# Altium PCB Pillpal_PCB01.PcbDoc
Units mm, origin at the board's own origin, x right, y up, seen from the top; angles counter-clockwise.
Board outline 46 x 59.6 mm, 2 copper layers (Top Layer, Bottom Layer); 30 components, 29 nets, 132 pads, 32 vias.
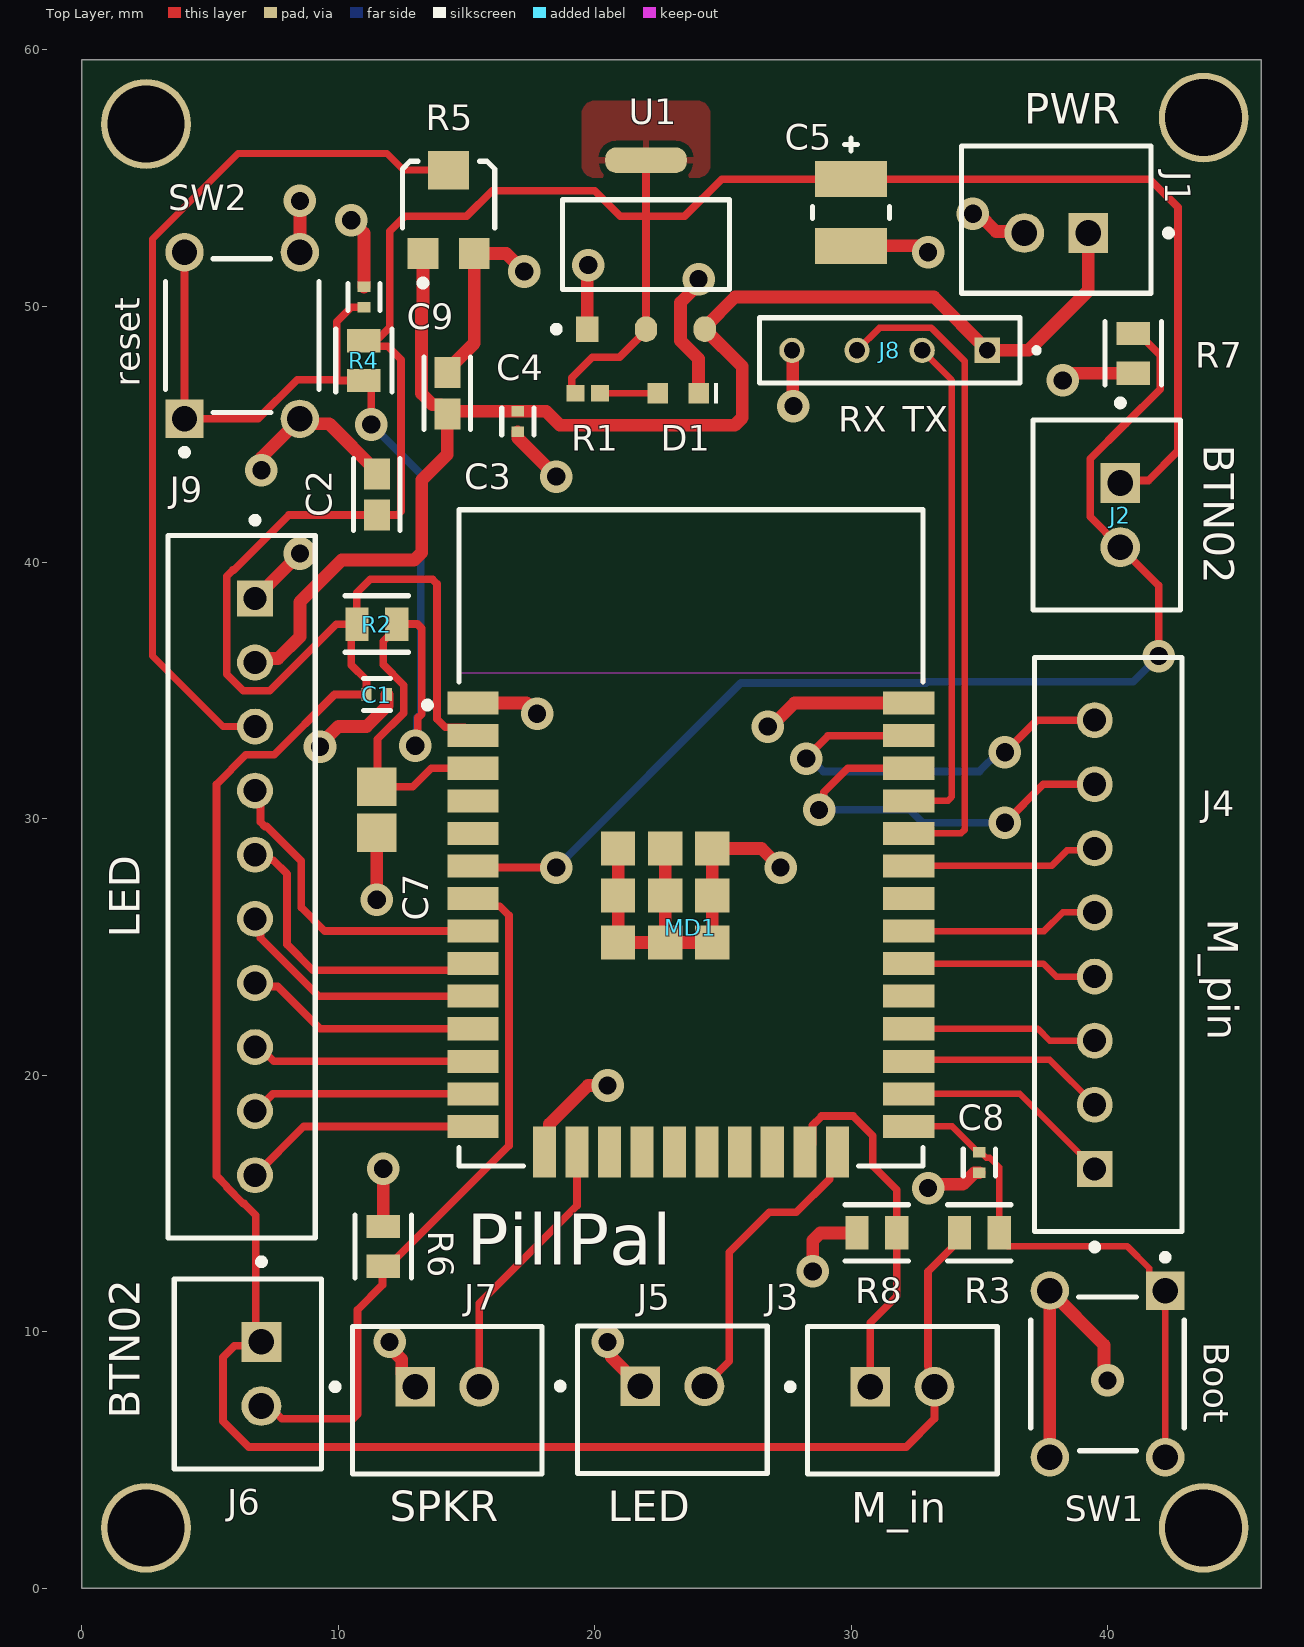
[diagram p0: Top Layer view]
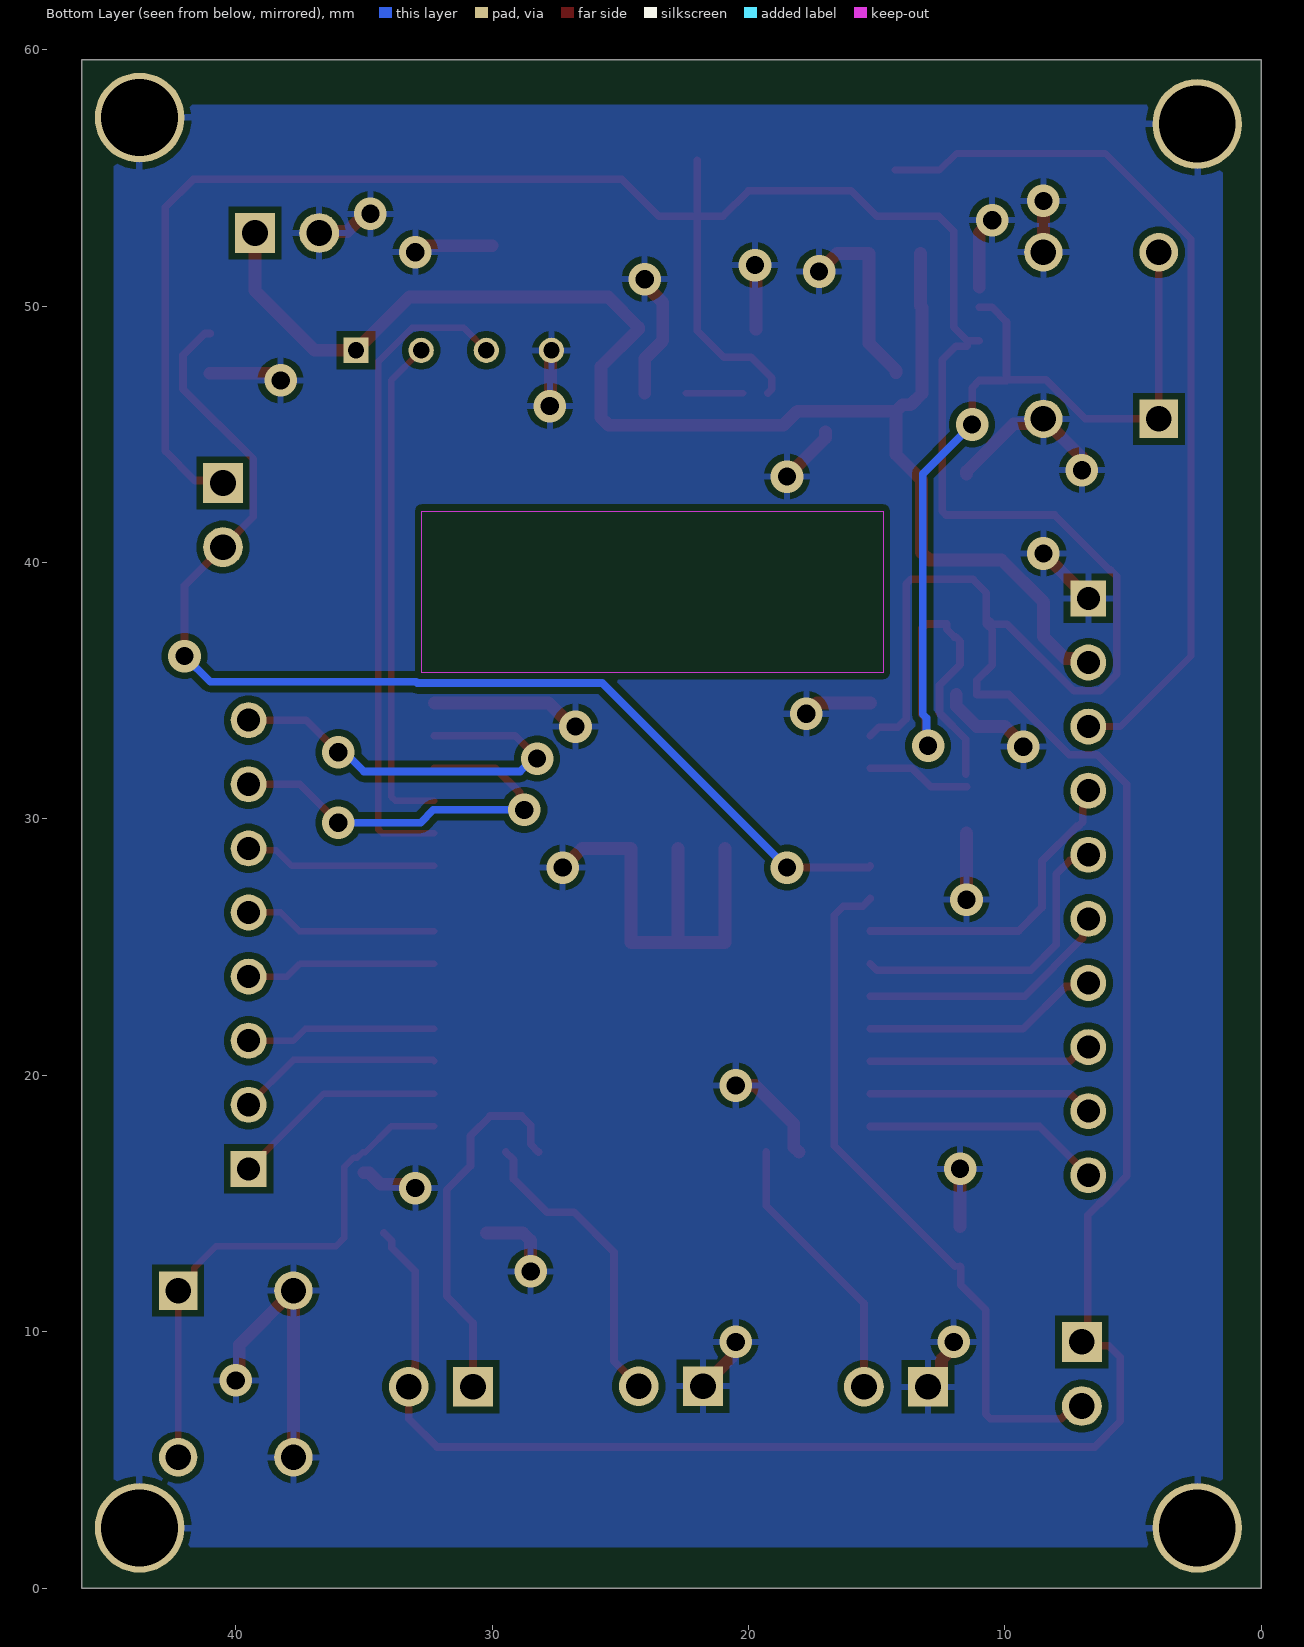
[diagram p1: Bottom Layer view, seen from below]
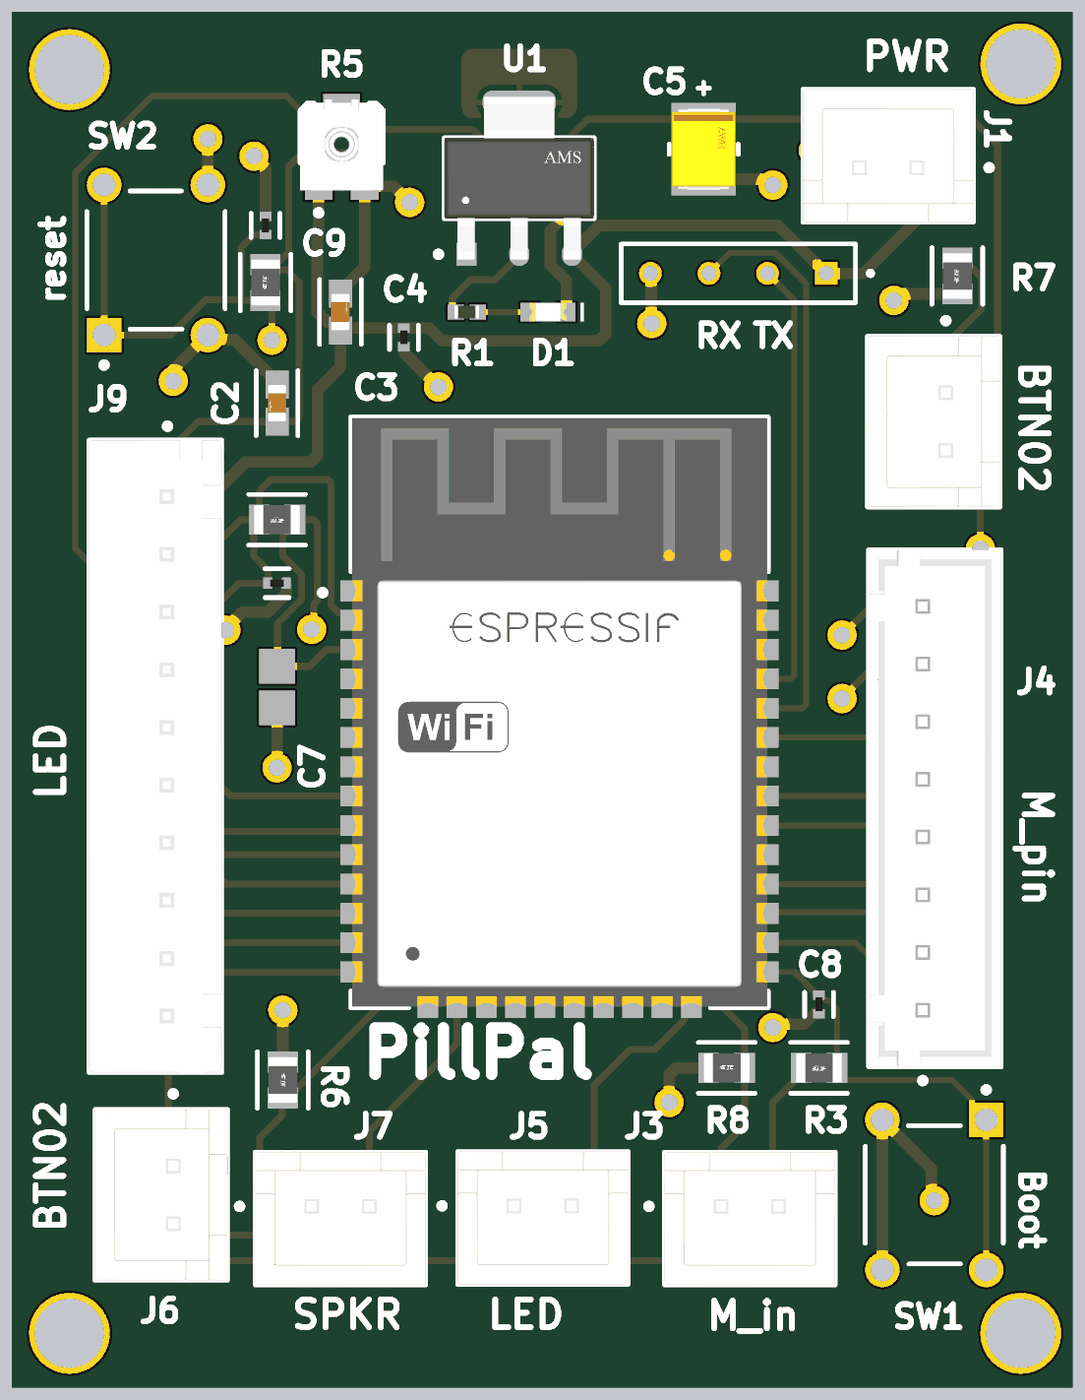
[diagram p2: 3D render of the assembled board from above, using the file's embedded part models]

## Layer stack, top to bottom
Top Solder: solder mask 0.0102, Solder Resist, Dk 3.5
Top Layer: signal copper 0.0356
Dielectric 1: dielectric 0.32, FR-4, Dk 4.8
Bottom Layer: signal copper 0.0356
Bottom Solder: solder mask 0.0102, Solder Resist, Dk 3.5

## Board outline
0,0 46,0 46,59.6 0,59.6

## Design rules (kind name [scope] priority, off if disabled: settings)
Clearance Clearance_1 [OnMid vs OnMid] p1: gap=0.254 ignorepadtopadclearanceinfootprint=FALSE except(0: Arc-Hole Track-Hole SMDPad-Hole THPad-Hole Via-Hole Fill-Hole Poly-Hole Region-Hole Text-Hole Hole-Hole) sourcerule=38 cellrowname=All cellrowtype=0 cellcolname=All cellcoltype=0 innerlayers=TRUE
Clearance Clearance_2 [(ExistsOnLayer('Top Layer') Or ExistsOnLayer('Bottom Layer')) vs (ExistsOnLayer('Top Layer') Or ExistsOnLayer('Bottom Layer'))] p2: gap=0.254 ignorepadtopadclearanceinfootprint=FALSE except(0: Arc-Hole Track-Hole SMDPad-Hole THPad-Hole Via-Hole Fill-Hole Poly-Hole Region-Hole Text-Hole Hole-Hole) sourcerule=38 cellrowname=All cellrowtype=0 cellcolname=All cellcoltype=0 outerlayers=TRUE
Clearance [All] p3: gap=0.254 ignorepadtopadclearanceinfootprint=FALSE ismatrix=TRUE
HoleSize [All] p1: absolutevalues=TRUE maxlimit=3 minlimit=0.025 maxpercent=80.000 minpercent=20.000
MinimumSolderMaskSliver [All] p1: minsoldermaskwidth=0.09
PolygonConnect [All] p1: connectstyle=Relief reliefconductorwidth=0.254 reliefentries=4 polygonreliefangle="90 Angle" airgapwidth=0.254
RoutingTopology RoutingTopology_1 [All] p1: topology=Vertical
RoutingTopology [All] p2: topology=Shortest
RoutingVias [All] p1: holewidth=0.711 width=1.27 viastyle="Through Hole" minholewidth=0.711 minwidth=1.27 maxholewidth=0.711 maxwidth=1.27
SolderMaskExpansion [All] p1: expansion=0.102 istentingtop=FALSE
UnRoutedNet [All] p1: checkbadconnections=TRUE
Width MaxMinWidth_1 [All] p1: maxlimit=0.5 minlimit=0.254 preferedwidth=0.3 minimp=50.000000 maximp=50.000000 favimp=50.000000
Width [All] p2: maxlimit=0.254 minlimit=0.254 preferedwidth=0.254
26 further rules are at their usual default settings.

## Components (designator, comment, footprint, x,y, rotation, side; value= is the part's Value field where it differs from the comment)
C1 "0.1uF" FP-GRM15-MFG 11.5,34.85 r0 top value=0.10μF
C2 "10uF" FP-GRM188-0_1-e0_2_0_55-IPC_A 11.5,42.652 r270 top
C3 "0.1uF" FP-GRM15-MFG 17,45.5 r90 top value=0.10μF
C4 "10uF" FP-GRM188-0_1-e0_2_0_55-IPC_A 14.25,46.6 r90 top
C5 "TAJB226K016RNJ" FP-TAJB-MFG 30,53.65 r90 top
C7 "1uF" CAPC2013X145X50ML20T25 11.5,30.35 r90 top
C8 "0.1uF" FP-GRM15-MFG 35,16.6 r90 top value=0.10μF
C9 "0.1uF" FP-GRM15-MFG 11,50.35 r270 top value=0.10μF
D1 "150060RS75000" WL-SMCW_0603_150060xx75000 23.25,46.6 r180 top
J1 "B2B-XH-A(LF)(SN)" FP-B2B-XH-A_LF_SN-MFG 38,53.375 r180 top
J2 "B2B-XH-A(LF)(SN)" FP-B2B-XH-A_LF_SN-MFG 39.975,41.85 r270 top
J3 "B2B-XH-A(LF)(SN)" FP-B2B-XH-A_LF_SN-MFG 32,7.325 r0 top
J4 "B8B-XH-A(LF)(SN)" FP-B8B-XH-A_LF_SN-MFG 40.025,25.1 r270 top
J5 "B2B-XH-A(LF)(SN)" FP-B2B-XH-A_LF_SN-MFG 23.029,7.35 r0 top
J6 "B2B-XH-A(LF)(SN)" FP-B2B-XH-A_LF_SN-MFG 6.475,8.35 r270 top
J7 "B2B-XH-A(LF)(SN)" FP-B2B-XH-A_LF_SN-MFG 14.25,7.325 r0 top
J8 "TS-104-T-A" SAMTEC_TS-104-T-A 31.5,48.274 r180 top
J9 "B10B-XH-A(LF)(SN)" FP-B10B-XH-A_LF_SN-MFG 6.225,27.35 r90 top
MD1 "ESP32-WROOM-32D" FP-ESP32-WROOM-32D-MFG 23.75,29.255 r0 top
R1 "RC0402JR-0775RL" RESC1005X40X25ML5T10 19.725,46.6 r0 top
R2 "10k" FP-CRG0805-IPC_C 11.5,37.6 r180 top
R3 "10k" FP-CRG0805-IPC_C 35,13.85 r180 top
R4 "10k" FP-CRG0805-IPC_C 11,47.876 r90 top
R5 "TC33X-2-103E" BOUR-TC33X-2_V 14.3,53.85 r90 top
R6 "10k" FP-CRG0805-IPC_C 11.75,13.324 r270 top
R7 "10k" FP-CRG0805-IPC_C 41,48.158 r90 top
R8 "10k" FP-CRG0805-IPC_C 31,13.85 r0 top
SW1 "1825910-6" TECO-1825910-6_V 40,8.35 r270 top
SW2 "1825910-6" TECO-1825910-6_V 6.25,48.85 r90 top
U1 "AMS1117-3.3" FP-AMS1117-IPC_C 22,52.395 r90 top

## Footprints (in the part's own frame and the unit in brackets; to place one, negate y for a bottom-side part, rotate by r counter-clockwise, add the part's x,y. Pads: shape width x height; smd on the part's side, far side on the other; paste and mask are expansions set on the pad)
BOUR-TC33X-2_V [mm] "SMD, 3-Leads, Body 3.8x3.6mm"
  rect 1.2x1.2 smd: 1(-1.8,1) 3(-1.8,-1)
  rect 1.5x1.6 smd: 2(1.45,0)
  silkscreen extent -3.07,-1.8 1.8,1.8, body extent -2,-1.8 1.96,1.8, height 1.15
CAPC2013X145X50ML20T25 [mm] "Chip Capacitor, 2-Leads, Body 2.00x1.25mm, IPC Low Density"
  rect 1.5x1.55 smd: 1(-0.9,0) 2(0.9,0)
  body extent -1.1,-0.72 1.1,0.72, height 1.45
FP-AMS1117-IPC_C [mm]
  rect 1.004x0.872 smd paste+0 mask+0: 1(-3.295,2.29)
  rrect100% 1.004x0.872 smd paste+0 mask+0: 2(-3.295,0) 3(-3.295,-2.29)
  rrect87% 1.004x3.182 smd paste+0 mask+0: 4(3.295,0)
  silkscreen extent -3.42,-3.25 1.75,3.62, body extent -3.9,-3.35 3.9,3.35, height 0.25
FP-B2B-XH-A_LF_SN-MFG [mm]
  rect 1.55x1.55 hole 1 paste-2539.97 mask+0: 1(-1.25,0.525)
  round 1.55 hole 1 paste-2539.97 mask+0: 2(1.25,0.525)
  silkscreen extent -4.5,-2.88 3.7,2.88, body extent -3.8,-2.98 3.8,2.98, height 0.25
FP-B8B-XH-A_LF_SN-MFG [mm]
  rect 1.4x1.4 hole 0.9 paste-2539.97 mask+0: 1(8.75,-0.525)
  round 1.4 hole 0.9 paste-2539.97 mask+0: 2(6.25,-0.525) 3(3.75,-0.525) 4(1.25,-0.525) 5(-1.25,-0.525) 6(-3.75,-0.525) 7(-6.25,-0.525) 8(-8.75,-0.525)
  silkscreen extent -11.2,-2.88 11.92,2.88, body extent -11.3,-2.98 11.3,2.98, height 0.25
FP-B10B-XH-A_LF_SN-MFG [mm]
  rect 1.4x1.4 hole 0.9 paste-2539.97 mask+0: 1(11.25,-0.525)
  round 1.4 hole 0.9 paste-2539.97 mask+0: 2(8.75,-0.525) 3(6.25,-0.525) 4(3.75,-0.525) 5(1.25,-0.525) 6(-1.25,-0.525) 7(-3.75,-0.525) 8(-6.25,-0.525) 9(-8.75,-0.525) 10(-11.25,-0.525)
  silkscreen extent -13.7,-2.88 14.42,2.88, body extent -13.8,-2.98 13.8,2.98, height 0.25
FP-CRG0805-IPC_C [mm]
  rect 0.906x1.307 smd paste+0 mask+0: 1(-0.776,0) 2(0.776,0)
  silkscreen extent -1.23,-1.1 1.23,1.1, body extent -1.33,-0.8 1.33,0.8, height 0.25
FP-ESP32-WROOM-32D-MFG [mm]
  rect 2x0.9 smd paste+0 mask+0: 1(-8.5,5.26) 2(-8.5,3.99) 3(-8.5,2.72) 4(-8.5,1.45) 5(-8.5,0.18) 6(-8.5,-1.09) 7(-8.5,-2.36) 8(-8.5,-3.63) 9(-8.5,-4.9) 10(-8.5,-6.17) 11(-8.5,-7.44) 12(-8.5,-8.71) 13(-8.5,-9.98) 14(-8.5,-11.25) 25(8.5,-11.25) 26(8.5,-9.98) 27(8.5,-8.71) 28(8.5,-7.44) 29(8.5,-6.17) 30(8.5,-4.9) 31(8.5,-3.63) 32(8.5,-2.36) 33(8.5,-1.09) 34(8.5,0.18) 35(8.5,1.45) 36(8.5,2.72) 37(8.5,3.99) 38(8.5,5.26)
  rect 0.9x2 smd paste+0 mask+0: 15(-5.715,-12.25) 16(-4.445,-12.25) 17(-3.175,-12.25) 18(-1.905,-12.25) 19(-0.635,-12.25) 20(0.635,-12.25) 21(1.905,-12.25) 22(3.175,-12.25) 23(4.445,-12.25) 24(5.715,-12.25)
  rect 1.33x1.33 smd paste+0 mask+0: 39(-2.835,-4.075) 39(-2.835,-2.24) 39(-2.835,-0.405) 39(-1,-4.075) 39(-1,-2.24) 39(-1,-0.405) 39(0.835,-4.075) 39(0.835,-2.24) 39(0.835,-0.405)
  Keep-Out Layer region: -9,6.45 9,6.45 9,12.75 -9,12.75
  Keep-Out Layer region: -9,6.45 9,6.45 9,12.75 -9,12.75
  silkscreen extent -10.4,-12.8 9.05,12.8, body extent -9.6,-13.35 9.6,12.9, height 0.25
FP-GRM15-MFG [mm]
  rect 0.4x0.5 smd paste+0 mask+0: 1(-0.4,0) 2(0.4,0)
  silkscreen extent -0.53,-0.63 0.53,0.63, body extent -0.7,-0.38 0.7,0.38, height 0.25
FP-GRM188-0_1-e0_2_0_55-IPC_A [mm]
  rect 1.208x1.012 smd paste+0 mask+0: 1(-0.802,0) 2(0.802,0)
  silkscreen extent -1.41,-0.91 1.41,0.91, body extent -1.91,-1.01 1.91,1.01, height 0.25
FP-TAJB-MFG [mm]
  rect 1.4x2.8 smd paste+0 mask+0: 1(-1.3,0) 2(1.3,0)
  silkscreen extent -0.23,-1.5 2.9,1.5, body extent -2.1,-1.6 2.1,1.6, height 0.25
RESC1005X40X25ML5T10 [mm] "Chip Resistor, 2-Leads, Body 1.05x0.55mm, IPC Low Density"
  rect 0.7x0.65 smd: 1(-0.475,0) 2(0.475,0)
  body extent -0.53,-0.28 0.53,0.28, height 0.4
SAMTEC_TS-104-T-A [mm]
  rect 0.985x0.985 hole 0.635: 01(-3.81,0)
  round 0.985 hole 0.635: 02(-1.27,0) 03(1.27,0) 04(3.81,0)
  silkscreen extent -5.83,-1.27 5.08,1.27
TECO-1825910-6_V [mm] "Switch, 4-Leads, Body 5.99x5.99mm"
  rect 1.5x1.5 hole 0.99: 1(-3.25,2.25)
  round 1.5 hole 0.99: 2(3.25,2.25) 3(-3.25,-2.25) 4(3.25,-2.25)
  silkscreen extent -4.67,-2.99 2.99,3, body extent -3,-2.99 2.99,3, height 5
WL-SMCW_0603_150060xx75000 [mm] "SMD Mono-color Chip LED, body 1.6x0.8mm"
  rect 0.8x0.8 smd: 1(-0.8,0) 2(0.8,0)
  silkscreen extent -1.55,-0.4 -1.4,0.4, body extent -0.8,-0.4 0.8,0.4, height 0.7

## Part data
C1 C3 C8 C9: library part CMP-2100-03641-2, "CAP CER 0.1UF 16V X7R 0402", Capacitance=0.10μF, Manufacturer=Murata, Manufacturer Part Number=GRM155R71C104KA88D, Package=GRM15, Temperature="-55°C to +125°C", Temperature Characteristic=X7R, Temperature Range High=+125°C, Temperature Range Low=-55°C, Tolerance=10%, Voltage Rating=16Vdc, Category=Cap, ComponentLink2Description=Datasheet, ComponentLink2URL=https://search.murata.co.jp/Ceramy/image/img/A01X/G101/ENG/GRM155R71H471KA01-01A.pdf, Device Class L1="Passive Components", Device Class L2=Capacitors, Device Class L3="Ceramic Capacitors", Digikey Description="CAP CER 0.1UF 16V X7R 0402", Height=0.55mm, Ipc Land Pattern Name=CAPC10050X219, Lead Free=yes, Material=Ceramic, Mouser Description="0402 0.1 uF 16V ±10 % Tolerance X7R SMT Multilayer Ceramic Capacitor", Octopart=https://octopart.com/grm155r71c104ka88d-murata-196880, RoHS=TRUE, Standoff Height=0mm
C2 C4: library part CMP-2006-02792-2, "Chip Multilayer Ceramic Capacitors for General Purpose, 0603, 10uF, X5R, 15%, 20%, 6.3V", Case Code (Imperial)=0603, Case Code (Metric)=1608, Dielectric=X5R, Max Operating Temperature=85°C, Min Operating Temperature=-55°C, Package Quantity=4000, Tolerance=20%, Voltage=6.3V, Capacitance=10uF, Case/Package=0603, Depth=0.8mm, Height=0.8mm, Lead Free="Lead Free", Length=1.6mm, Material=Ceramic, Mount="Surface Mount", Packaging="Tape and Reel", Radiation Hardening=No, REACH SVHC="No SVHC", Termination=SMD/SMT, Thickness=0.035inch, Voltage Rating=6.3V, Voltage Rating (DC)=6.3V, Width=0.031inch
C5: library part CMP-2100-03689-2, "22uF 16V  ±10% 2.3Ω 1210  SMD Tantalum Capacitor", Capacitance=22uF, Case Code (Imperial)=1210, Case Code (Metric)=3528, Dielectric Material=Tantalum, ESR (Equivalent Series Resistance)=2.3R, Leakage Current=3.5uA, Max Operating Temperature=125°C, Min Operating Temperature=-55°C, Package Quantity=1, Tolerance=10%, Voltage=16V, Case/Package=1210, Construction=Flat, Depth=2.8mm, Dissipation Factor=6%, Features="General Purpose", Height=1.9mm, Height - Seated (Max)=0.083inch, Lead Free="Lead Free", Length=3.5mm, Mount="Surface Mount", Number of Pins=2, Packaging="Tape and Reel", Polarity=Polar, Radiation Hardening=No, REACH SVHC="No SVHC", RoHS Compliant=Yes, Series=TAJ, Termination=SMD/SMT, Voltage Rating=16V, Voltage Rating (DC)=16V, Width=2.8mm
C7: library part CMP-1036-04731-2, Manufacturer=Kemet, Part Number=C0805C105K9PACTU
D1: library part CMP-1426-00001-3, Case Code (Imperial)=0603, Case Code (Metric)=1608, Color=Red, Forward Current=100mA, Forward Voltage=2V, Max Junction Temperature (Tj)=95°C, Max Operating Temperature=85°C, Max Reverse Voltage (DC)=5V, Min Operating Temperature=-40°C, Power Dissipation=72mW, Test Current=20mA, Case/Package=0603, Dominant Wavelength=625nm, Height=700µm, Length=1.6mm, Lens Style="Clear, Rectangular", Luminous Intensity=250mcd, Mount="Surface Mount", NexarPartId=29717776, Packaging="Tape and Reel", Peak Wavelength=630nm, REACH SVHC=Unknown, Reverse Voltage=5V, RoHS=Compliant, Viewing Angle=140°, Wavelength=625nm, Width=800µm
J1 J2 J3 J5 J6 J7: library part CMP-2000-05888-3, "CONN HEADER VERT 2POS 2.5MM", Color=Natural, Contact Resistance=20mR, Current Rating=3A, Housing Color=White, Insulation Resistance=1GR, Max Operating Temperature=85°C, Max Voltage Rating (AC)=250V, Min Operating Temperature=-25°C, Connector Type="Male Pin", Contact Material=Brass, Contact Plating=Tin, Contact Type="Male Pin", Depth=5.75mm, Fastening Type=Detent, Housing Material=Polyamide, Lead Free="Lead Free", Lead Pitch=2.5mm, Length=7.4mm, Max Current Rating=3A, Max Voltage Rating (DC)=250V, Mount="Through Hole", Number of Contacts=2, Number of Positions=2, Number of Rows=1, Orientation=Straight, Packaging=Bulk, Pitch=2.5mm, REACH SVHC="No SVHC", Series=XH, Termination=Solder, Voltage Rating=250V, Voltage Rating (AC)=250V, Wire/Cable Gauge=22AWG
J4: library part CMP-17438-000015-1, "CONN HEADER VERT 8POS 2.5MM", Color=Natural, Contact Resistance=20mR, Current Rating=3A, Housing Color=White, Insulation Resistance=1GR, Max Operating Temperature=85°C, Max Voltage Rating (AC)=250V, Min Operating Temperature=-25°C, Connector Type="Male Pin", Contact Material=Brass, Contact Plating=Tin, Contact Type="Male Pin", Depth=5.75mm, Fastening Type=Detent, Housing Material=Polyamide, Lead Free="Lead Free", Lead Pitch=2.5mm, Length=22.4mm, Max Current Rating=3A, Mount="Through Hole", Number of Contacts=8, Number of Positions=8, Number of Rows=1, Orientation=Straight, Packaging=Bulk, Pitch=2.5mm, REACH SVHC="No SVHC", Series=XH, Termination=Press-Fit, Voltage Rating=250V, Voltage Rating (AC)=250V, Wire/Cable Gauge=22AWG
J8: "TS - Samtec 2.54mm Single Row Machined Terminal Strip - Fast Stock", Package=None, Supplier Part Number 1=SAM1112-04-ND, Availability="In Stock", Check_prices=https://www.snapeda.com/parts/TS-104-T-A/Samtec+Inc./view-part/?ref=eda, MF="Samtec Inc.", MP=TS-104-T-A, Price=None, Purchase-URL=https://pricing.snapeda.com/search/part/TS-104-T-A/?ref=eda, SnapEDA_Link=https://www.snapeda.com/parts/TS-104-T-A/Samtec+Inc./view-part/?ref=snap, Supplier 1=Digikey
J9: library part CMP-17439-000145-1, "CONN HEADER VERT 10POS 2.5MM", Color=Natural, Contact Resistance=20mR, Current Rating=3A, Flammability Rating="UL94 V-0", Housing Color=White, Insulation Resistance=1GR, Max Operating Temperature=85°C, Max Voltage Rating (AC)=250V, Min Operating Temperature=-25°C, Connector Type=Header, Contact Finish - Mating=TIN, Contact Material=Brass, Contact Plating=Tin, Contact Shape=Square, Contact Type="Male Pin", Depth=5.75mm, Fastening Type=Detent, Gender=Male, Housing Material=Polyamide, Insulation Color=Natural, Insulation Material=Nylon, Lead Free="Lead Free", Lead Pitch=2.5mm, Length=27.4mm, Mated Stacking Heights=9.8mm, Max Current Rating=3A, Max Voltage Rating (DC)=250V, Mount="Through Hole", Number of Contacts=10, Number of Positions=10, Number of Rows=1, Orientation=Straight, Packaging=Bulk, Pitch=2.5mm, REACH SVHC="No SVHC", Series=XH, Termination=Solder, Voltage Rating=250V, Voltage Rating (AC)=250V, Wire/Cable Gauge=22AWG
MD1: library part CMP-194065-000003-1, "WIFI MODULE 32MBITS SPI FLASH", Manufacturer="Espressif Systems", Max Frequency=2484MHz, Max Supply Voltage=3.6V, Min Supply Voltage=3V, Nominal Supply Current=500mA, Temperature="-40°C to +85°C", Temperature Range High=+85°C, Temperature Range Low=-40°C, Automotive=No, Bandwidth=72MHz, Category=UNK, ComponentLink2Description=Datasheet, ComponentLink2URL=https://www.espressif.com/sites/default/files/documentation/esp32-wroom-32d_esp32-wroom-32u_datasheet_en.pdf, Data Rate=150Mbits/s, Device Class L1="Integrated Circuits (ICs)", Device Class L2="RF Semiconductors and Devices", Device Class L3=Transceivers, Digikey Description="WIFI MODULE 32MBITS SPI FLASH", Height=3.2mm, Interface=I2C,SPI,UART,Ethernet,I2S,Other, Lead Free=Yes, Manufacturer Part Number=ESP32-WROOM-32D, Mouser Description="Wi-Fi/BT BLE Module ESP32-D0WD, SPI Flash, UART, P", Number Of Adc Channels=16, Number Of Gpio=32, Octopart=https://octopart.com/esp32-wroom-32d-espressif+systems-91040050, Package=ESP32-WROOM-32D, RoHS=TRUE, Sensitivity=-98dBm
R1: library part CMP-2002-08044-2, "Chip Resistor, 75 Ohm, +/- 5%, 0.063 W, -55 to 155 degC, 0402 (1005 Metric), RoHS, Tape and Reel", Case Code (Imperial)=0402, Case Code (Metric)=1005, Max Operating Temperature="155 degC", Min Operating Temperature="-55 degC", Package Quantity=200, Power Rating="62.5 mW", Resistance="75 Ohm", Tolerance=5%, Voltage Rating="50 V", Case/Package=0402, ComponentLink1Description="Manufacturer URL", ComponentLink1URL=http://www.yageo.com/, ComponentLink2Description=Datasheet, ComponentLink2URL=http://www.yageo.com/documents/recent/PYu-RC_Group_51_RoHS_L_04.pdf, DatasheetVersion="Rev. 4, 02/2016", Height="0.35 mm", Length="1 mm", Mount="Surface Mount", Mounting Technology="Surface Mount", PackageDescription="2-Pin Surface Mount Device, Body 1 x 0.5 mm", Packaging="Tape and Reel", PartNumber=RC0402JR-0775RL, Radiation Hardening=No, REACH SVHC="No SVHC", RoHSCompliant=true, Width="0.5 mm"
R2 R3 R4 R6 R7 R8: library part CMP-03211-011401-1, "RES SMD 10K OHM 1% 1/8W 0805", Case/Package=0805, Max Operating Temperature=125°C, Min Operating Temperature=-55°C, Number of Resistors=1, Power Rating=125mW, Resistance=10kR, Resistor Type="Thick Film", Temperature Coefficient=100ppm/°C, Tolerance=1%, Voltage Rating=150V, Depth=1.25mm, ELV=Compliant, Height=0.55mm, Length=2mm, Mount="Surface Mount", Number of Terminations=2, Packaging="Tape and Reel", Radiation Hardening=No, RoHS Compliant=Yes, Series="CRG Series", Technology="THICK FILM", Termination=Solder
R5: library part CMP-2100-03695-1, "Trimming Potentiometer, 10000 Ohm, -40 to 100 degC, 3-Pin SMD, RoHS, Tape and Reel", Case/Package=SMD/SMT, Colour=Silver, Manufacturer=Bourns, Max Operating Temperature=100degC, Max Power Dissipation=100mW, Min Operating Temperature=-40degC, Package Description="3-Pin Surface Mount Device, Body 3.8 x 3.6 mm", Package Quantity=2500, Package Reference=TC33X-2, Resistance=10KOhm, Temperature Coefficient=250ppm/degreesC, Tolerance=25%, Voltage Rating (DC)=50V, Composition=Potentiometer, Contact Plating=Silver, Datasheet URL=http://www.bourns.com/docs/Product-Datasheets/TC33.pdf, Datasheet Version=42583.0, Depth=3.8mm, Height=0.047inch, Lead Free=LeadFree, Length=3mm, Manufacturer URL=http://www.bourns.com/, Military Standard=Not, Mount=SurfaceMount, Number of Turns=1, Packaging=TapeandReel, Power Rating=100mW, Radiation Hardening=No, REACH SVHC=NoSVHC, RoHSCompliant=true, Taper=Linear, Termination=FootPrint, Weight=29.4mg, Width=0.118inch
SW1 SW2: library part CMP-1684-00021-1, "Tact Switch, SPST-NO, 0.05 A, -35 to 85 degC, 4-Pin THD, RoHS, Bulk", Actuator Color=Black, Contact Rating @ Voltage=0.05A@24VDC, Dielectric Strength=500VAC, Manufacturer="TE Connectivity", Maximum AC Voltage Rating=N/A, Maximum Contact Resistance=100mOhm, Maximum DC Voltage Rating=24V, Minimum Insulation Resistance=100MOhm, Operating Temperature=-35to85C, Package Description="4-Pin Through Hole Device, Body 5.99 x 5.99 mm, Pitch 6.5 mm", Package Reference=THD, Actuator Length=1.4mm, Actuator Material=PolybutyleneTerephthalate, Actuator Style=RoundButton, Base Material=N/A, Body Orientation=Straight, Bushing Type=Unthreaded, Contact Material=CopperAlloy, Contact Plating=Silver, Datasheet URL=http://www.te.com/commerce/DocumentDelivery/DDEController?Action=showdoc&DocId=Customer+Drawing%7F1825910%7FC9%7Fpdf%7FEnglish%7FENG_CD_1825910_C9.pdf%7F1825910-6, Datasheet Version="Rev. C9", Dimension=5.99x5mm, Electrical Life=100000Cycles, Family=1825910, Function=MomentaryContact, Housing Material=N/A, Illumination=N/R, Manufacturer URL=http://www.te.com, Mechanical Life=100000Cycles, Mounting=ThroughHole, Packaging=N/A, Part No=1825910-6, Pole Throw Configuration=SPST, Product Weight=N/A, RoHS=Yes, Seal Description=N/A, Seal Location=N/A, Switch Configuration=OFF(ON), Terminal Type=PCPins, Thread Size=N/R
U1: library part CMP-209535-000001-1, "LDO Voltage Regulators 1A, 3.3V", Dropout Voltage=1.1V, Manufacturer="Advanced Monolithic Systems", Max Junction Temp=+125°C, Max Power Dissipation=1.2W, Max Supply Voltage=15V, Nominal Supply Current=5mA, Output Current=1A, Output Voltage=3.3V, Package=AMS1117, Temperature="-40°C to +125°C", Temperature Range Low=-40°C, Automotive=No, Category=IC, ComponentLink2Description=Datasheet, ComponentLink2URL=http://www.advanced-monolithic.com/pdf/ds1117.pdf, Device Class L1="Integrated Circuits (ICs)", Device Class L2="Power Management ICs", Device Class L3="Voltage Regulators - Linear", Height=1.8mm, Ipc Land Pattern Name=SOT229P700X180-4, Lead Free=Yes, Manufacturer Part Number=AMS1117-3.3, Number Of Outputs=1, Octopart=https://octopart.com/ams1117-3.3-advanced+monolithic+systems-25899300, Output Type=Fixed, RoHS=TRUE, Standoff Height=0.64mm, Temperature Range High=+125°C

## Free pads (board coordinates)
  round 3.5 hole 3: 6(2.5,57.1) 7(43.75,57.35) 8(43.75,2.35) 9(2.5,2.35)

## Via types
v1: diameter 1.27, hole 0.711, Top Layer to Bottom Layer, 32 vias

## Nets (pads, with @x,y where several pads share a name; then routed paths per layer and width w, separated by ;. In a path a pad name is that pad's centre, name@x,y a point inside that pad or via, vN(x,y) a via of type N, cw(c..) or ccw(c..) an arc to the next point about the centre after c; other vN are vias at no path point)
+5: C3.2 C4.1 J1.1 J8.01 J9.2 R5.1 U1.3 | length 57.3
  Top Layer w0.5: J9.2 6.9,36.25 7.65,36.25 8.5,37.1 8.5,38.465 10.135,40.1 12.957,40.1 13.25,40.393 13.25,43.215 14.25,44.215 C4.1 ; R5.1 13.3,50.002 13.24,49.942 13.24,46.589 13.677,46.152 13.994,46.152 14.25,45.896 C4.1 ; J1.1 39.25,50.6 36.924,48.274 J8.01 33.234,50.35 25.474,50.35 24.29,49.166 U1.3 25.75,47.64 25.75,45.643 25.457,45.35 18.65,45.35 18.1,45.9 C3.2 14.352,45.9 C4.1
CHIP_PU: C7.2 C9.2 MD1.3 R2.1 R4.1 SW2.1 SW2.2 | length 49.6
  Top Layer w0.3: SW2.2 SW2.1 6.868,45.6 8.4,47.132 9.942,47.132 ; C9.2 10.5,49.95 9.942,49.392 9.942,47.132 ; v1(11.281,45.381) 11.281,46.819 R4.1 9.942,47.1 9.942,47.132 ; C7.2 12.9,31.25 13.625,31.975 MD1.3 ; C7.2@11.525,31.75 11.525,33.1 12.554,34.129 12.554,35.217 11.75,36.021 11.75,36.921 11.926,37.096 11.973,37.096 12.276,37.399 R2.1 13.074,37.6 13.25,37.424 13.25,34.085 13.1,33.935 13.1,32.95 v1(13,32.85)
  Bottom Layer w0.3: v1(11.281,45.381) 13.212,43.451 13.212,34.085 13.062,33.935 13.062,32.912 v1(13,32.85)
GND: C1.2 C2.1 C3.1 C4.2 C5.1 C7.1 C8.1 C9.1 D1.1 J1.2 J5.1 J7.1 J8.04 J9.1 MD1.1 MD1.15 MD1.38 MD1.39 pad.6 pad.7 pad.8 pad.9 R5.3 R6.1 R7.1 R8.1 SW1.3 SW1.4 SW2.3 SW2.4 U1.1 | length 101.1
  Top Layer w0.5: J9.1 v1(8.5,40.35) ; v1(7,43.6) 7,44.1 SW2.3 8.691,45.409 9.643,45.409 11.5,43.552 C2.1 ; SW2.4 v1(8.5,54.1) ; v1(9.285,32.815) 9.285,32.885 10,33.6 11.1,33.6 11.9,34.4 C1.2 ; v1(10.5,53.35) 11,52.85 C9.1 ; v1(11.5,26.85) C7.1 ; R6.1 v1(11.75,16.35) ; v1(12,9.6) 12,9.392 12.475,8.917 12.475,8.375 J7.1 ; C4.2 14.25,47.5 15.3,48.55 R5.3 16.55,52.05 v1(17.25,51.35) ; MD1.1 17.335,34.515 v1(17.75,34.1) ; C3.1 17,44.85 v1(18.5,43.35) ; MD1.15 18.235,17.205 18.235,18.098 19.737,19.6 v1(20.5,19.6) ; U1.1 19.71,51.56 v1(19.75,51.6) ; v1(20.5,9.6) 20.647,9.453 20.647,9.007 J5.1 ; MD1.39@20.915,28.85 20.915,27.015 20.915,25.18 MD1.39@22.75,25.18 ; MD1.39@22.75,28.85 22.75,27.015 MD1.39@22.75,25.18 ; D1.1 24.05,47.944 23.35,48.645 23.35,50.142 24.05,50.842 v1(24.05,51.05) ; v1(26.75,33.6) 26.879,33.6 27.794,34.515 MD1.38 ; v1(27.25,28.1) 26.5,28.85 24.585,28.85 24.585,27.015 24.585,25.18 MD1.39@22.75,25.18 ; J8.04 27.75,48.214 27.72,48.184 27.72,46.13 v1(27.75,46.1) ; v1(28.5,12.35) 28.5,13.557 28.793,13.85 R8.1 ; C5.1 32.542,52.35 32.792,52.1 v1(33,52.1) ; v1(33,15.6) 33.147,15.747 34.356,15.747 34.808,16.2 C8.1 ; v1(34.75,53.6) 34.958,53.6 35.651,52.908 36.692,52.908 J1.2 ; SW1.4 SW1.3 39.865,9.485 39.865,8.235 v1(40,8.1) ; v1(38.25,47.1) 38.532,47.382 R7.1
GPIO: C8.2 MD1.25 R3.1 SW1.1 SW1.2 | length 21.4
  Top Layer w0.254: MD1.25 33.945,18.005 34.95,17 C8.2 35.05,17 35.269,16.781 35.408,16.781 35.776,16.413 R3.1 35.776,13.649 36.102,13.323 40.777,13.323 41.627,12.473 41.627,12.223 SW1.1 SW1.1@42.25,10.85 ; SW1.1@41.875,11.225 SW1.1@42.25,10.85 ; SW1.2 SW1.1@42.25,10.85
IO2: J5.2 MD1.24 | length 11.9
  Top Layer w0.3: J5.2 25.25,8.846 25.25,13.1 26.802,14.652 27.863,14.652 29.165,15.954 29.165,16.705 MD1.24
IO4: J4.1 MD1.26 | length 8.5
  Top Layer w0.254: MD1.26 36.575,19.275 J4.1
IO12: J9.10 MD1.14 | length 9.3
  Top Layer w0.3: J9.10 8.655,18.005 MD1.14
IO13: J7.2 MD1.16 | length 10.7
  Top Layer w0.3: J7.2 15.5,11.1 19.305,14.905 MD1.16
IO14: J9.9 MD1.13 | length 8.8
  Top Layer w0.3: J9.9 6.778,18.6 7.453,19.275 MD1.13
IO15: J3.1 MD1.23 R8.2 | length 14.6
  Top Layer w0.3: MD1.23 28.495,17.305 28.495,18.056 28.848,18.409 30.082,18.409 30.846,17.645 30.846,16.464 31.776,15.534 R8.2 31.776,11.376 30.75,10.35 J3.1
IO16: J4.2 MD1.27 | length 8
  Top Layer w0.254: MD1.27 32.305,20.6 37.75,20.6 J4.2
IO17: J4.3 MD1.28 | length 7.4
  Top Layer w0.254: MD1.28 37.285,21.815 37.75,21.35 J4.3
IO18: J4.4 MD1.30 | length 7.5
  Top Layer w0.254: MD1.30 37.495,24.355 38,23.85 J4.4
IO19: J4.5 MD1.31 | length 7.6
  Top Layer w0.254: MD1.31 37.525,25.625 38.25,26.35 J4.5
IO21: J4.6 MD1.33 | length 7.5
  Top Layer w0.254: MD1.33 37.815,28.165 38.419,28.769 39.419,28.769 J4.6
IO22: J4.7 MD1.36 | length 16
  Top Layer w0.3: v1(28.75,30.35) 28.936,30.536 28.936,31.036 29.875,31.975 MD1.36 ; v1(36,29.85) 37.5,31.35 J4.7
  Bottom Layer w0.3: v1(28.75,30.35) 32.292,30.35 32.792,29.85 v1(36,29.85)
IO23: J4.8 MD1.37 | length 16.7
  Top Layer w0.3: v1(28.25,32.35) 28.25,32.393 29.102,33.245 MD1.37 ; v1(36,32.6) 37.25,33.85 J4.8
  Bottom Layer w0.3: v1(28.25,32.35) 28.411,32.35 28.911,31.85 35.003,31.85 35.753,32.6 v1(36,32.6)
IO25: J9.6 MD1.10 | length 10.1
  Top Layer w0.3: J9.6 6.96,25.89 6.96,25.356 9.232,23.085 MD1.10
IO26: J9.7 MD1.11 | length 9.2
  Top Layer w0.3: J9.7 6.888,23.462 7.638,23.462 9.285,21.815 MD1.11
IO27: J9.8 MD1.12 | length 8.7
  Top Layer w0.3: J9.8 6.921,21.1 7.476,20.545 MD1.12
IO32: J9.4 MD1.8 | length 12.4
  Top Layer w0.3: J9.4 6.96,30.89 6.96,29.88 7.136,29.704 7.207,29.704 8.554,28.357 8.554,26.546 9.475,25.625 MD1.8
IO33: J9.5 MD1.9 | length 12.1
  Top Layer w0.3: J9.5 6.96,28.39 7.46,28.39 8,27.85 8,25.1 9,24.1 14.995,24.1 MD1.9
IO34: J2.2 MD1.6 R7.2 | length 45.6
  Top Layer w0.3: MD1.6 15.315,28.1 v1(18.5,28.1) ; R7.2 41.201,48.934 42.058,48.077 42.058,46.762 40.698,45.402 40.681,45.402 39.321,44.042 39.321,41.779 J2.2 42,39.1 v1(42,36.35)
  Bottom Layer w0.3: v1(18.5,28.1) 25.701,35.301 32.917,35.301 32.966,35.35 41,35.35 v1(42,36.35)
IO35: J6.2 MD1.7 R6.2 | length 27.5
  Top Layer w0.3: J6.2 7.301,7.1 7.801,6.6 10.574,6.6 10.75,6.776 10.75,10.85 11.721,11.821 11.721,12.518 R6.2 ; R6.2@11.951,12.548 16.654,17.251 16.654,26.242 16.301,26.595 15.55,26.595 MD1.7
NetD1_2: D1.2 R1.2 | length 2.2
  Top Layer w0.254: R1.2 D1.2
NetJ9_3: J9.3 R5.2 | length 34.6
  Top Layer w0.27: J9.3 5.5,33.6 2.746,36.354 2.746,52.619 6.081,55.954 11.896,55.954 12.55,55.3 R5.2
RX: J8.03 MD1.34 | length 25.6
  Top Layer w0.254: J8.03 31.103,49.148 33.132,49.148 34.436,47.843 34.436,29.584 34.288,29.435 MD1.34
TX: J8.02 MD1.35 | length 19.7
  Top Layer w0.254: MD1.35 33.78,30.705 33.928,30.854 33.928,47.116 32.826,48.219 32.826,48.274 J8.02
VCC_3V3: C1.1 C2.2 C5.2 J2.1 J3.2 J6.1 MD1.2 R1.1 R2.2 R3.2 R4.2 U1.2 U1.4 | length 171.5
  Top Layer w0.3: J6.1 J6.1@6.775,9.6 ; R2.2@10.603,37.72 10.48,37.597 9.922,37.597 7.321,34.996 6.293,34.996 5.646,35.643 5.646,39.467 5.883,39.704 5.915,39.704 8.061,41.85 C2.2 12.297,41.85 12.446,41.999 12.446,47.904 11.92,48.43 11.504,48.43 11.477,48.457 R4.2@11.477,48.652 ; R4.2 R4.2@11.477,48.652 ; MD1.2 14.927,33.568 14.176,33.568 13.846,33.898 13.846,39.174 13.67,39.35 11.25,39.35 10.724,38.824 R2.2 10.5,37.376 10.5,36 11.1,35.4 C1.1 9.85,34.85 7.496,32.496 6.396,32.496 5.25,31.35 5.25,16.071 5.646,15.675 5.646,15.643 6.293,14.996 6.325,14.996 6.775,14.546 J6.1@6.775,9.6 ; R1.1 19.099,46.751 19.099,47.199 19.899,47.999 20.965,47.999 22,49.034 U1.2 22,53.5 ; U1.4 22,53.5 ; R3.2 33.921,13.547 33.921,13.271 33,12.35 33,8.651 33.011,8.64 33.011,8.089 J3.2 33.25,6.6 32.15,5.5 6.5,5.5 5.5,6.5 5.5,9 5.951,9.451 6.626,9.451 J6.1@6.775,9.6 ; J2.1 40.595,43.195 41.595,43.195 42.75,44.35 42.75,53.85 41.65,54.95 C5.2 24.95,54.95 23.5,53.5 22,53.5 ; R4.2@11.477,48.652 12,49.176 12,52.918 12.582,53.5 15,53.5 16,54.5 20,54.5 21,53.5 22,53.5
pads on no net: MD1.4 MD1.5 MD1.17 MD1.18 MD1.19 MD1.20 MD1.21 MD1.22 MD1.29 MD1.32

## Polygon pours and split planes (outlines as drawn)
VCC_3V3 on Top Layer "NONET_L01_P-001" (solid, pour order 8): 20,55 cw(c20,55.5) 19.5,55.5 19.5,57.5 cw(c20,57.5) 20,58 24,58 cw(c24,57.5) 24.5,57.5 24.5,55.5 cw(c24,55.5) 24,55
GND on Bottom Layer "NONET_L01_P-001" (solid, pour order 0): 1.5,1.6 1.5,57.85 44.75,57.85 44.75,1.6

## Silkscreen, mask and mechanical layers (free items; w line width, h text height)
Top Overlay:
  text "PWR" at 36.754,57.104 h1.2
  text "reset" at 2.246,46.854 h1 r90
  text "RX" at 29.504,45.104 h1
  text "TX" at 32.004,45.104 h1
  text "BTN02" at 43.754,44.596 h1.2 r270
  text "M_pin" at 43.904,26.096 h1.2 r270
  text "LED" at 2.246,25.354 h1.2 r90
  text "PillPal" at 15,12.6 h2
  text "Boot" at 43.754,9.596 h1 r270
  text "BTN02" at 2.246,6.604 h1.2 r90
  text "SPKR" at 12.004,2.604 h1.2
  text "LED" at 20.504,2.604 h1.2
  text "M_in" at 30.004,2.554 h1.2